# Altium PCB BopITPCB.PcbDoc
Units mm, origin at the board's own origin, x right, y up, seen from the top; angles counter-clockwise.
Board outline 45.47 x 50.8 mm, 2 copper layers (Top Layer, Bottom Layer); 12 components, 21 nets, 66 pads, 0 vias.
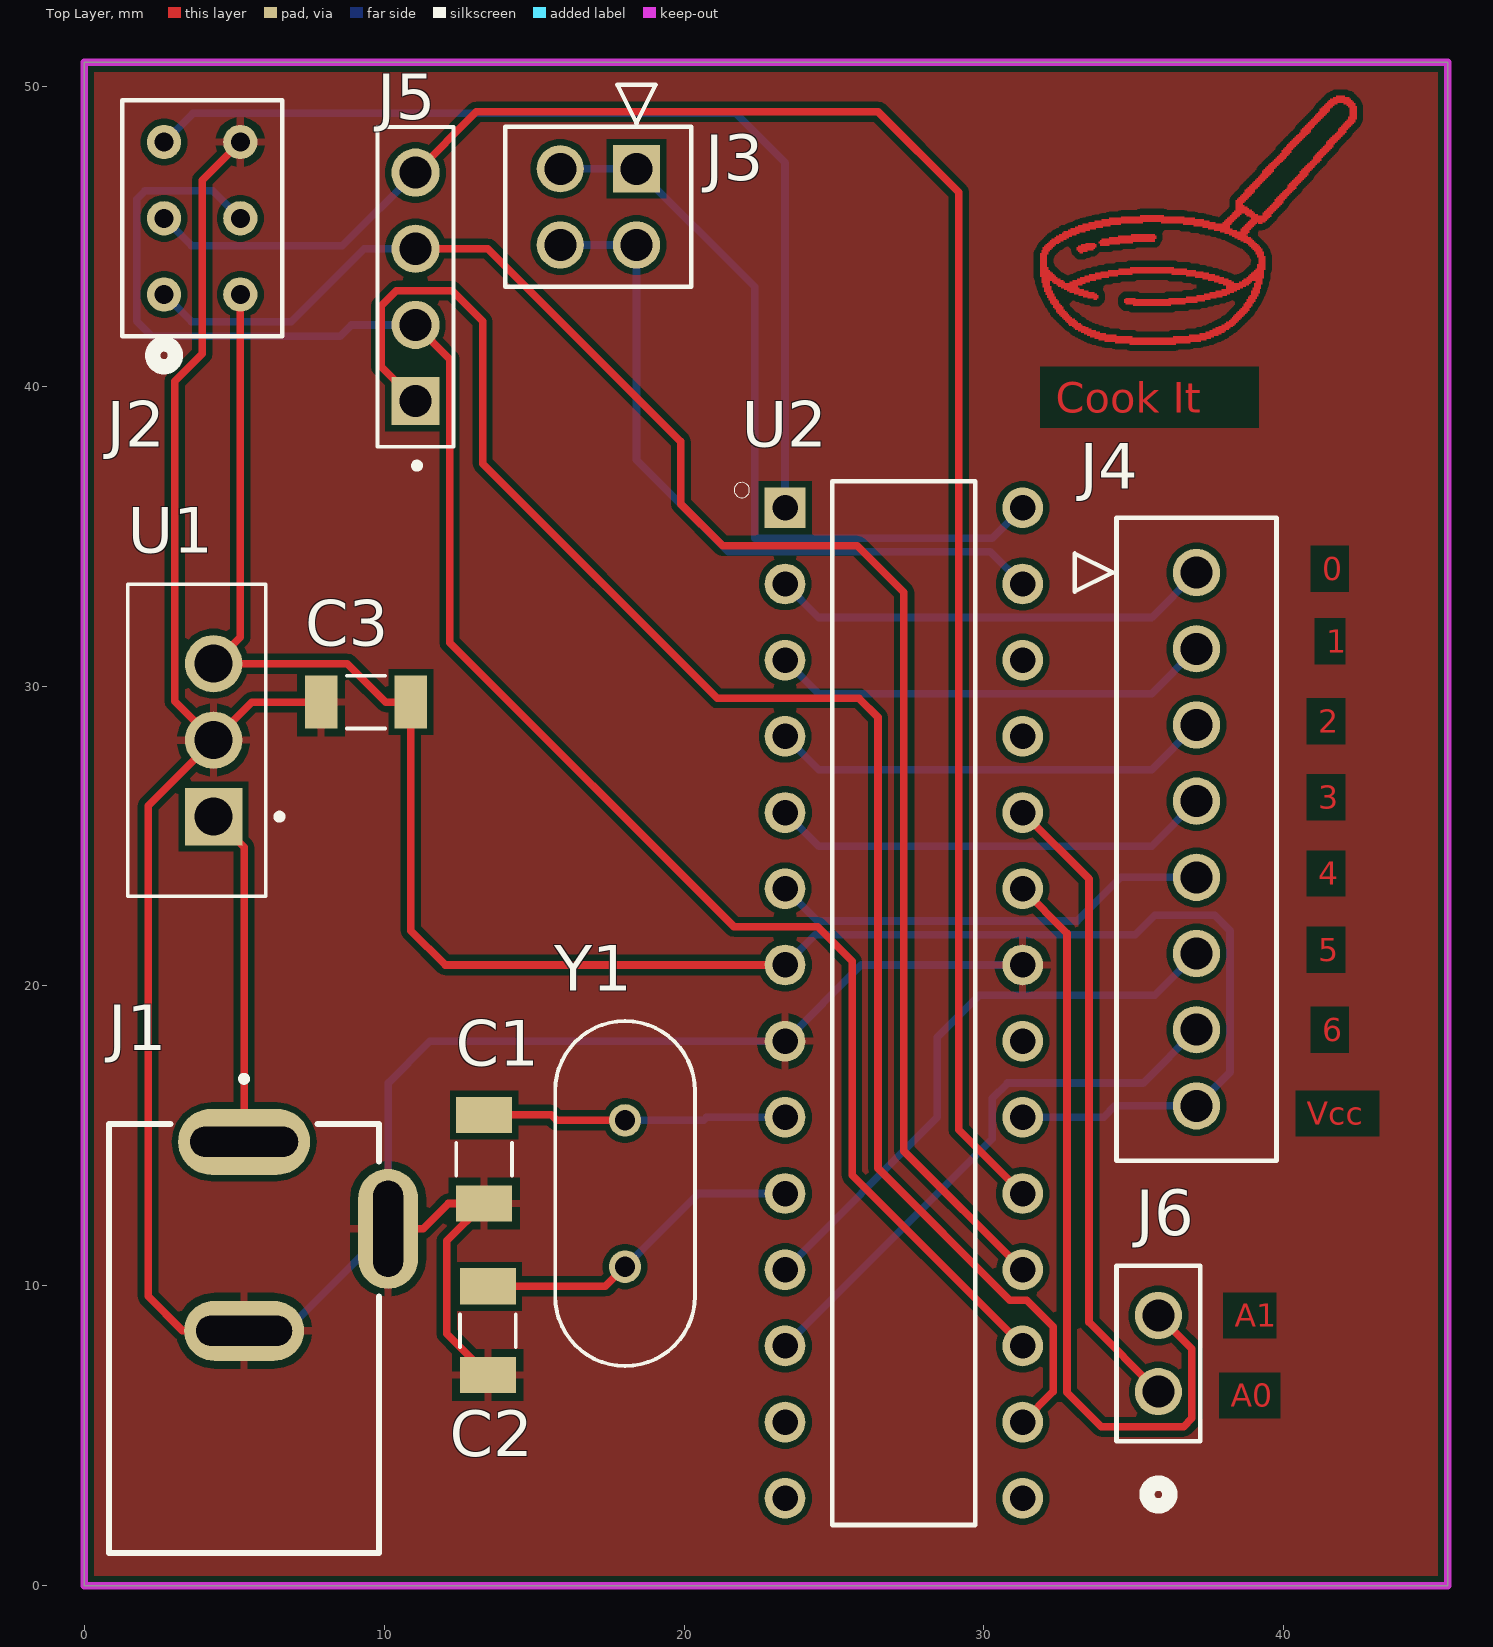
[diagram p0: Top Layer view]
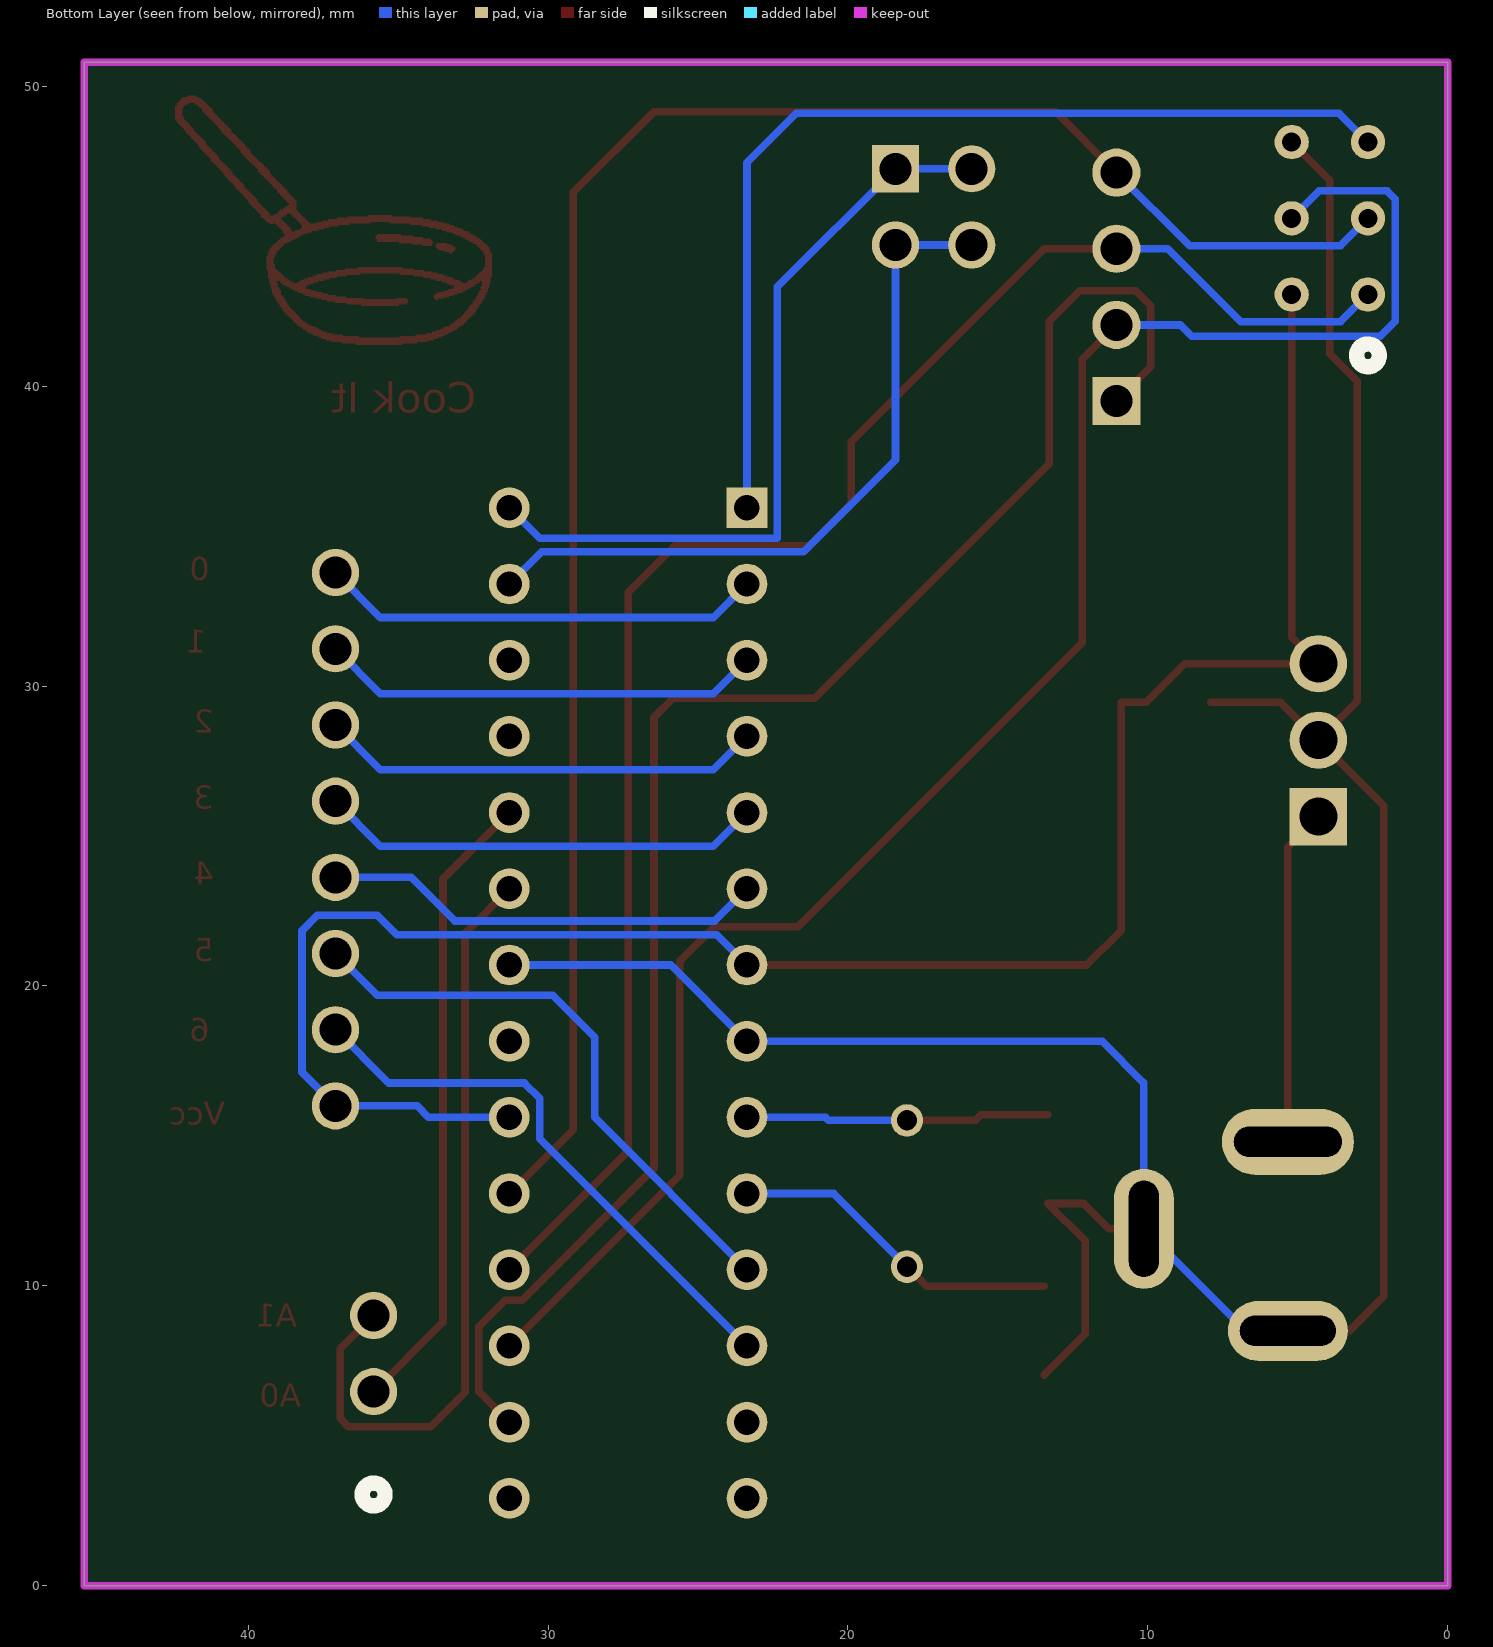
[diagram p1: Bottom Layer view, seen from below]

## Layer stack, top to bottom
Top Solder: solder mask 0.0102, Solder Resist, Dk 3.5
Top Layer: signal copper 0.0356
Dielectric 1: dielectric 0.32, FR-4, Dk 4.8
Bottom Layer: signal copper 0.0356
Bottom Solder: solder mask 0.0102, Solder Resist, Dk 3.5

## Board outline
0,0 0,50.8 45.466,50.8 45.466,0

## Design rules (kind name [scope] priority, off if disabled: settings)
BoardOutlineClearance [All] p1: gap=0.2 ignorepadtopadclearanceinfootprint=FALSE except(0.4: Arc-SplitBarrior Arc-SplitContinuation Track-SplitBarrior Track-SplitContinuation SMDPad-SplitBarrior SMDPad-SplitContinuation THPad-SplitBarrior THPad-SplitContinuation Via-SplitBarrior Via-SplitContinuation Fill-SplitBarrior Fill-SplitContinuation Poly-SplitBarrior Poly-SplitContinuation Region-SplitBarrior Region-SplitContinuation Text-SplitBarrior Text-SplitContinuation)
Clearance "Clearance Bottom Layer" [OnLayer('Bottom Layer')] p1: gap=0.203 ignorepadtopadclearanceinfootprint=TRUE except(0.254: Arc-Text Track-Text SMDPad-Text THPad-Text Via-Text Fill-Text Poly-Text Region-Text Text-Text)
Clearance "Clearance Top Layer" [OnLayer('Top Layer')] p2: gap=0.203 ignorepadtopadclearanceinfootprint=TRUE except(0.254: Arc-Text Track-Text SMDPad-Text THPad-Text Via-Text Fill-Text Poly-Text Region-Text Text-Text)
Clearance [All] p3: gap=0.2 ignorepadtopadclearanceinfootprint=FALSE except(0.089: Arc-Arc Arc-Track Arc-SMDPad Track-Track Track-SMDPad SMDPad-SMDPad; 0.127: Arc-Via Track-Via SMDPad-Via THPad-Via Via-Via; 0.254: Arc-Text Track-Text SMDPad-Text THPad-Text Via-Text Fill-Text Poly-Text Region-Text Text-Text)
HoleSize [All] p1: absolutevalues=TRUE maxlimit=6.3 minlimit=0.2 maxpercent=80.000 minpercent=20.000
MinimumAnnularRing [All] p1: minimumring=0.076
MinimumSolderMaskSliver [All] p1: minsoldermaskwidth=0.1
PolygonConnect PolygonConnect_1 [All] p1: connectstyle=Relief reliefconductorwidth=0.254 reliefentries=4 polygonreliefangle="90 Angle" airgapwidth=0.254
RoutingCorners [All] p1: cornerstyle=Round minsetback=2.54 maxsetback=2.54
RoutingVias [All] p1: holewidth=0.711 width=1.27 viastyle="Through Hole" minholewidth=0.711 minwidth=1.27 maxholewidth=0.711 maxwidth=1.27
SilkToSilkClearance [All] p1: silktosilkclearance=0.1
SilkToSolderMaskClearance [IsPad] p1: minsilkscreentomaskgap=0.1 clearancetoexposedcopper=TRUE
SolderMaskExpansion [All] p1: expansion=0.102 istentingtop=FALSE
Width [All] p1: maxlimit=0.254 minlimit=0.254 preferedwidth=0.254
25 further rules are at their usual default settings.

## Components (designator, comment, footprint, x,y, rotation, side; value= is the part's Value field where it differs from the comment)
C1 "VJ1206A2R2CXEAC" CAPC3216X170N 13.335,14.224 r90 top
C2 "VJ1206A2R2CXEAC" CAPC3216X170N 13.462,8.509 r90 top
C3 "CL31B106MOHNNNE" CAPC3216X140N 9.398,29.464 r0 top
J1 "DCJ200-10-A-XX-K_REVA" GCT_DCJ200-10-A-XX-K_REVA 5.334,8.255 r0 top
J2 "61300621121" CONN06_6130_7P62X5P08_WRE 2.667,43.053 r90 top
J3 "PPTC022LFBN-RC" CONN_PPTC022LFBN-RC_SUL 18.415,47.244 r0 top
J4 "PPTC081LFBN-RC" CONN_PPTC081LFBN-RC_SUL 37.084,33.782 r90 top
J5 "PPTC041LFBN-RC" SULLINS_PPTC041LFBN-RC 11.049,43.307 r90 top
J6 "PPTC021LFBN-RC" CONN2_LFBN-RC_SUL 35.814,6.477 r90 top
U1 "L7805CV" TO255P1040X460X1968-3 4.318,25.644 r90 top
U2 "ATMEGA328P-PU" DIP794W46P254L2967H457Q28B 27.328,19.431 r0 top
Y1 "HC-49/U-S16000000ABJB" XTAL_HC49P488W43L1150T466H350 18.034,13.081 r90 top

## Footprints (in the part's own frame and the unit in brackets; to place one, negate y for a bottom-side part, rotate by r counter-clockwise, add the part's x,y. Pads: shape width x height; smd on the part's side, far side on the other; paste and mask are expansions set on the pad)
CAPC3216X140N [mm]
  rect 1.08x1.77 smd: 1(-1.495,0) 2(1.495,0)
  silkscreen extent -0.63,-0.88 0.63,0.88
CAPC3216X170N [mm]
  rect 1.21x1.86 smd: 1(-1.477,0) 2(1.477,0)
  silkscreen extent -0.55,-0.93 0.55,0.93
CONN2_LFBN-RC_SUL [mil]
  round 62 / inner round 60 / far side round 62 hole 42 paste-99999 mask+0: 1(0,0) 2(100,0)
  silkscreen extent -150,-55 165,55
CONN06_6130_7P62X5P08_WRE [mil]
  round 45 / inner round 60 / far side round 45 hole 25 paste-99999 mask+0: 1(0,0) 2(0,-100) 3(100,0) 4(100,-100) 5(200,0) 6(200,-100)
  silkscreen extent -95,-155 255,55
CONN_PPTC022LFBN-RC_SUL [mil]
  rect 62x62 / inner round 60 / far side rect 62x62 hole 42 paste-99999 mask+0: 1(0,0)
  round 62 / inner round 60 / far side round 62 hole 42 paste-99999 mask+0: 2(0,-100) 3(-100,0) 4(-100,-100)
  silkscreen extent -172,-155 72,110
CONN_PPTC081LFBN-RC_SUL [mil]
  round 62 / inner round 60 / far side round 62 hole 42 paste-99999 mask+0: 1(0,0) 2(-100,0) 3(-200,0) 4(-300,0) 5(-400,0) 6(-500,0) 7(-600,0) 8(-700,0)
  silkscreen extent -772,-105 72,160
DIP794W46P254L2967H457Q28B [mm]
  rect 1.358x1.358 hole 0.85: 1(-3.96,16.51)
  round 1.358 hole 0.85: 2(-3.96,13.97) 3(-3.96,11.43) 4(-3.96,8.89) 5(-3.96,6.35) 6(-3.96,3.81) 7(-3.96,1.27) 8(-3.96,-1.27) 9(-3.96,-3.81) 10(-3.96,-6.35) 11(-3.96,-8.89) 12(-3.96,-11.43) 13(-3.96,-13.97) 14(-3.96,-16.51) 15(3.96,-16.51) 16(3.96,-13.97) 17(3.96,-11.43) 18(3.96,-8.89) 19(3.96,-6.35) 20(3.96,-3.81) 21(3.96,-1.27) 22(3.96,1.27) 23(3.96,3.81) 24(3.96,6.35) 25(3.96,8.89) 26(3.96,11.43) 27(3.96,13.97) 28(3.96,16.51)
  silkscreen extent -5.65,-17.4 2.38,17.4
GCT_DCJ200-10-A-XX-K_REVA [mm]
  oval 4.4x2.2 hole 1 slot 3.6 at 0 deg: 1(0,6.55)
  oval 4x2 hole 1 slot 3.2 at 0 deg: 2(0,0.25)
  oval 2x4 hole 1 slot 3.2 at 90 deg: 3(4.8,3.65)
  silkscreen extent -4.5,-7.15 4.5,8.75, body extent -4.5,-7.15 5.05,7.15, height 11
SULLINS_PPTC041LFBN-RC [mm]
  rect 1.605x1.605 / inner round 1.605 / far side rect 1.605x1.605 hole 1.07: 1(-3.81,0)
  round 1.605 hole 1.07: 2(-1.27,0) 3(1.27,0) 4(3.81,0)
  silkscreen extent -6.06,-1.27 5.33,1.27, body extent -5.33,-1.27 5.33,1.27, height 8.51
TO255P1040X460X1968-3 [mm]
  rect 1.91x1.91 / inner round 1.91 / far side rect 1.91x1.91 hole 1.27: 1(0,0)
  round 1.91 hole 1.27: 2(2.55,0) 3(5.1,0)
  silkscreen extent -2.65,-2.29 7.75,2.86, body extent -4.98,-1.76 4.98,2.69, height 19.68
XTAL_HC49P488W43L1150T466H350 [mm]
  round 1.08 hole 0.68: 1(-2.44,0) 2(2.44,0)
  silkscreen extent -5.75,-2.33 5.75,2.33

## Part data
C1 C2 C3: Package=None, Availability=Unavailable, Price=None
  C1 C2: MP=VJ1206A2R2CXEAC
  C3: MP=CL31B106MOHNNNE
J1: "Power Barrel Connector Jack 2.05mm ID (0.081), 5.50mm OD (0.217) Through Hole, Right Angle", Package=None, Check_prices=https://www.snapeda.com/parts/DCJ200-10-A-K1-K/Global+Connector+Technology/view-part/?ref=eda, MF="Global Connector Technology", MP=DCJ200-10-A-K1-K, SnapEDA_Link=https://www.snapeda.com/parts/DCJ200-10-A-K1-K/Global+Connector+Technology/view-part/?ref=snap
J2: "No Description Available", Mfr_Name="Wurth Electronics", RefDes=RefDes, Type=Type
J3 J4 J6: "No Description Available", Mfr_Name=Sullins, RefDes=RefDes, Type=Type
J5: "4 Position Header Connector 0.100 (2.54mm) Through Hole Tin", Package=None, Check_prices=https://www.snapeda.com/parts/PPTC041LFBN-RC/Sullins+Connector+Solutions/view-part/?ref=eda, Digi-Key_Part_Number=S7002-ND, MF="Sullins Connector", MP=PPTC041LFBN-RC, Purchase-URL=https://pricing.snapeda.com/search/part/PPTC041LFBN-RC/?ref=eda, SnapEDA_Link=https://www.snapeda.com/parts/PPTC041LFBN-RC/Sullins+Connector+Solutions/view-part/?ref=snap
U1: "Linear Voltage Regulator IC Positive Fixed 1 Output 1.5A TO-220", Package="TO-220-3 ON Semiconductor", Availability="In Stock", Check_prices=https://www.snapeda.com/parts/L7805CV/STMicroelectronics/view-part/?ref=eda, MF=STMicroelectronics, MP=L7805CV, Price=None, Purchase-URL=https://pricing.snapeda.com/search/part/L7805CV/?ref=eda, SnapEDA_Link=https://www.snapeda.com/parts/L7805CV/STMicroelectronics/view-part/?ref=snap
U2: "ATmega Series 20 MHz 32 KB Flash 2 KB SRAM 8-Bit Microcontroller - DIP-28", Package=None, Availability=Unavailable, MP=ATMEGA328P-PU, Price=None
Y1: "16 MHz Â±30ppm Crystal 18pF 50 Ohms HC-49/US", Package="HC-49/US Citizen Finetech Miyota", Availability="In Stock", Check_prices=https://www.snapeda.com/parts/HC-49/U-S16000000ABJB/Citizen+Finedevice+Co+Ltd/view-part/?ref=eda, MF="Citizen Finedevice Co Ltd", MP=HC-49/U-S16000000ABJB, Price=None, Purchase-URL=https://pricing.snapeda.com/search/part/HC-49/U-S16000000ABJB/?ref=eda, SnapEDA_Link=https://www.snapeda.com/parts/HC-49/U-S16000000ABJB/Citizen+Finedevice+Co+Ltd/view-part/?ref=snap

## Nets (pads, with @x,y where several pads share a name; then routed paths per layer and width w, separated by ;. In a path a pad name is that pad's centre, name@x,y a point inside that pad or via, vN(x,y) a via of type N, cw(c..) or ccw(c..) an arc to the next point about the centre after c; other vN are vias at no path point)
GND: C1.1 C2.1 C3.1 J1.2 J1.3 J2.6 U1.2 U2.8 U2.22 | length 92.8
  Top Layer w0.254: J2.6 3.937,46.863 3.937,41.072 3.023,40.157 3.023,29.489 U1.2 ; J1.2 3.281,8.505 2.134,9.652 2.134,26.01 U1.2 ; C3.1 5.588,29.464 U1.2 ; J1.3 11.303,11.905 12.145,12.747 C1.1 12.09,11.502 12.09,8.404 C2.1
  Bottom Layer w0.254: J1.2 6.734,8.505 J1.3 10.134,16.764 11.531,18.161 U2.8 25.908,20.701 U2.22
NetC1_2: C1.2 U2.9 Y1.2 | length 10.1
  Top Layer w0.254: C1.2 15.57,15.701 15.75,15.521 Y1.2
  Bottom Layer w0.254: Y1.2 20.65,15.521 20.75,15.621 U2.9
NetC2_2: C2.2 U2.10 Y1.1 | length 11.2
  Top Layer w0.254: C2.2 17.379,9.986 Y1.1
  Bottom Layer w0.254: Y1.1 20.474,13.081 U2.10
NetC3_2: C3.2 J2.2 J4.8 U1.3 U2.7 U2.20 | length 68.3
  Top Layer w0.254: J2.2 5.207,31.633 U1.3 8.778,30.744 10.058,29.464 C3.2 10.893,21.844 12.036,20.701 U2.7
  Bottom Layer w0.254: U2.7 24.377,21.71 35.045,21.71 35.687,22.352 37.694,22.352 38.202,21.844 38.202,17.12 J4.8 34.366,16.002 33.985,15.621 U2.20
NetJ1_1: J1.1 U1.1 | length 11.3
  Top Layer w0.254: U1.1 5.334,24.628 J1.1
NetJ2_1: J2.1 J5.3 U2.18 | length 56.2
  Top Layer w0.254: J5.3 13.462,44.577 19.888,38.151 19.888,36.068 21.285,34.671 25.781,34.671 27.33,33.122 27.33,14.499 U2.18
  Bottom Layer w0.254: J2.1 3.581,42.139 6.909,42.139 9.347,44.577 J5.3
NetJ2_3: J2.3 J5.4 U2.19 | length 64.1
  Top Layer w0.254: J5.4 13.081,49.149 26.467,49.149 29.159,46.457 29.159,15.21 U2.19
  Bottom Layer w0.254: J2.3 3.581,44.679 8.611,44.679 J5.4
NetJ2_4: J2.4 J5.2 U2.17 | length 61.7
  Top Layer w0.254: J5.2 12.192,40.894 12.192,31.445 21.666,21.971 24.46,21.971 25.603,20.828 25.603,13.686 U2.17
  Bottom Layer w0.254: J2.4 4.293,46.507 2.032,46.507 1.753,46.228 1.753,42.164 2.261,41.656 8.534,41.656 8.915,42.037 J5.2
NetJ2_5: J2.5 U2.1 | length 33.3
  Bottom Layer w0.254: J2.5 3.632,49.098 21.717,49.098 23.368,47.447 U2.1
NetJ3_1: J3.1 J3.3 U2.28 | length 25.8
  Bottom Layer w0.254: J3.3 J3.1 22.352,43.307 22.352,34.932 30.279,34.932 U2.28
NetJ3_2: J3.2 J3.4 U2.27 | length 24.3
  Bottom Layer w0.254: J3.4 J3.2 18.415,37.541 21.482,34.475 30.214,34.475 U2.27
NetJ4_1: J4.1 U2.2 | length 14.8
  Bottom Layer w0.254: U2.2 24.486,32.283 35.585,32.283 J4.1
NetJ4_2: J4.2 U2.3 | length 14.8
  Bottom Layer w0.254: U2.3 24.486,29.743 35.585,29.743 J4.2
NetJ4_3: J4.3 U2.4 | length 14.8
  Bottom Layer w0.254: U2.4 24.486,27.203 35.585,27.203 J4.3
NetJ4_4: J4.4 U2.5 | length 14.8
  Bottom Layer w0.254: U2.5 24.486,24.663 35.585,24.663 J4.4
NetJ4_5: J4.5 U2.6 | length 14.8
  Bottom Layer w0.254: U2.6 24.442,22.167 33.109,22.167 34.563,23.622 J4.5
NetJ4_6: J4.6 U2.11 | length 19.6
  Bottom Layer w0.254: U2.11 28.448,15.621 28.448,18.288 29.845,19.685 35.687,19.685 J4.6
NetJ4_7: J4.7 U2.12 | length 18.9
  Bottom Layer w0.254: U2.12 30.277,14.91 30.277,16.256 30.785,16.764 35.306,16.764 J4.7
NetJ5_1: J5.1 U2.16 | length 55.8
  Top Layer w0.254: J5.1 9.906,40.64 9.906,42.672 10.414,43.18 12.268,43.18 13.284,42.164 13.284,37.414 21.107,29.591 25.832,29.591 26.467,28.956 26.467,13.919 30.861,9.525 31.42,9.525 32.309,8.636 32.309,6.482 U2.16
NetJ6_1: J6.1 U2.24 | length 21.2
  Top Layer w0.254: U2.24 33.503,23.566 33.503,8.788 J6.1
NetJ6_2: J6.2 U2.23 | length 26
  Top Layer w0.254: U2.23 32.766,21.763 32.766,6.452 33.909,5.309 36.652,5.309 36.932,5.588 36.932,7.899 J6.2
pads on no net: U2.13 U2.14 U2.15 U2.21 U2.25 U2.26

## Polygon pours and split planes (outlines as drawn)
GND on Top Layer "GND_L01_P000" (solid, pour order 0): 0,0 0,50.8 45.466,50.8 45.466,0

## Keep-outs
Keep-Out Layer:
  the board outline again, w0.254

## Other copper
Top Layer:
  region: 33.391,44.768 33.685,44.768 33.685,44.719 33.735,44.719 33.735,44.621 33.685,44.621 33.685,44.572 33.636,44.572 33.636,44.523 33.44,44.523 33.44,44.474 33.293,44.474 33.293,44.425 33.194,44.425 33.194,44.474 33.145,44.474 33.145,44.523 33.096,44.523 33.096,44.621 33.145,44.621 33.145,44.67 33.244,44.67 33.244,44.719 33.391,44.719
  region: 34.127,44.67 33.882,44.67 33.882,44.768 33.833,44.768 33.833,44.817 33.882,44.817 33.882,44.867 33.931,44.867 33.931,44.916 34.177,44.916 34.177,44.965 34.471,44.965 34.471,45.014 34.913,45.014 34.913,45.063 35.699,45.063 35.699,45.014 35.748,45.014 35.748,44.916 35.699,44.916 35.699,44.817 34.962,44.817 34.962,44.768 34.52,44.768 34.52,44.719 34.177,44.719 34.177,44.67
  region: 531 vertices and 4 holes, not listed, extent 31.869,41.38 42.426,49.679
  text "Cook It" at 32.385,39.116 h1.02
  text "0" at 41.275,33.528 h0.76
  text "1" at 41.402,31.115 h0.76
  text "2" at 41.148,28.448 h0.76
  text "3" at 41.148,25.908 h0.76
  text "4" at 41.148,23.368 h0.76
  text "5" at 41.148,20.828 h0.76
  text "6" at 41.275,18.161 h0.76
  text "Vcc" at 40.767,15.367 h0.76
  text "A1" at 38.354,8.636 h0.76
  text "A0" at 38.227,5.969 h0.76